# Altium PCB PCB1.PcbDoc
Units mm, origin at the board's own origin, x right, y up, seen from the top; angles counter-clockwise.
Board outline 49.15 x 32.13 mm, 2 copper layers (Top Layer, Bottom Layer), stack 1.571 mm thick; 7 components, 5 nets, 22 pads, 59 vias.
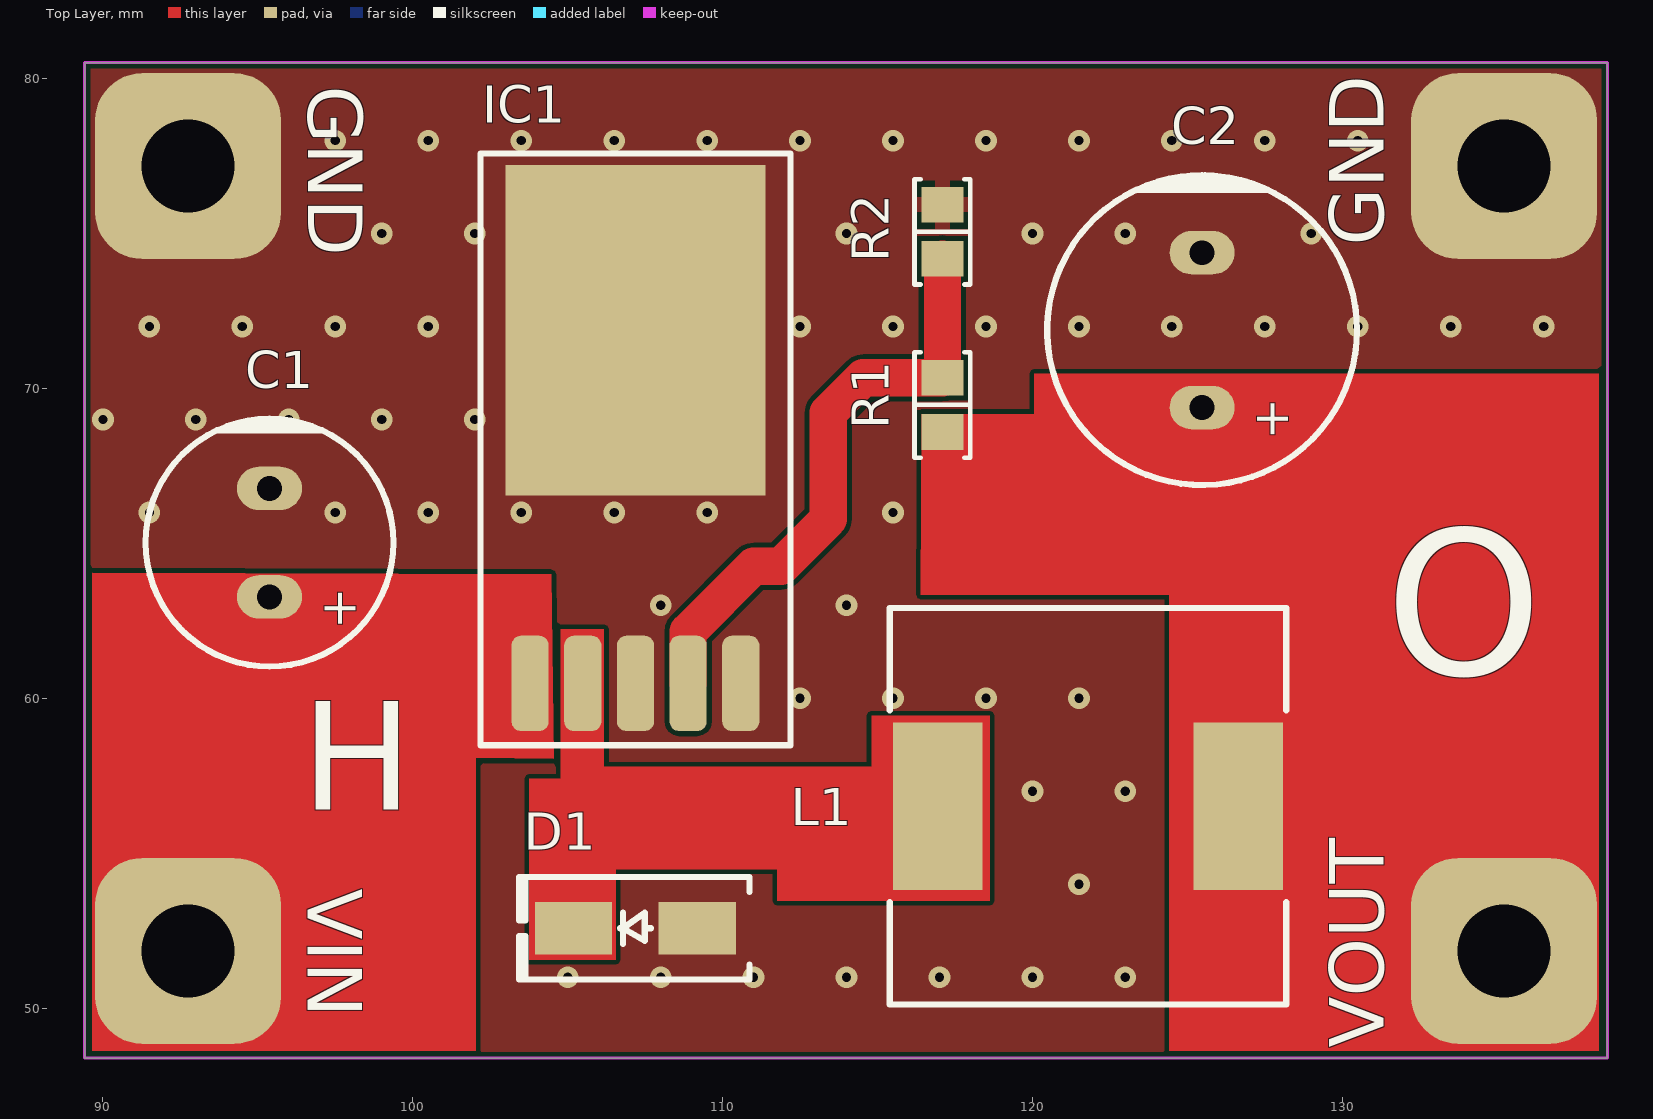
[diagram p0: Top Layer view]
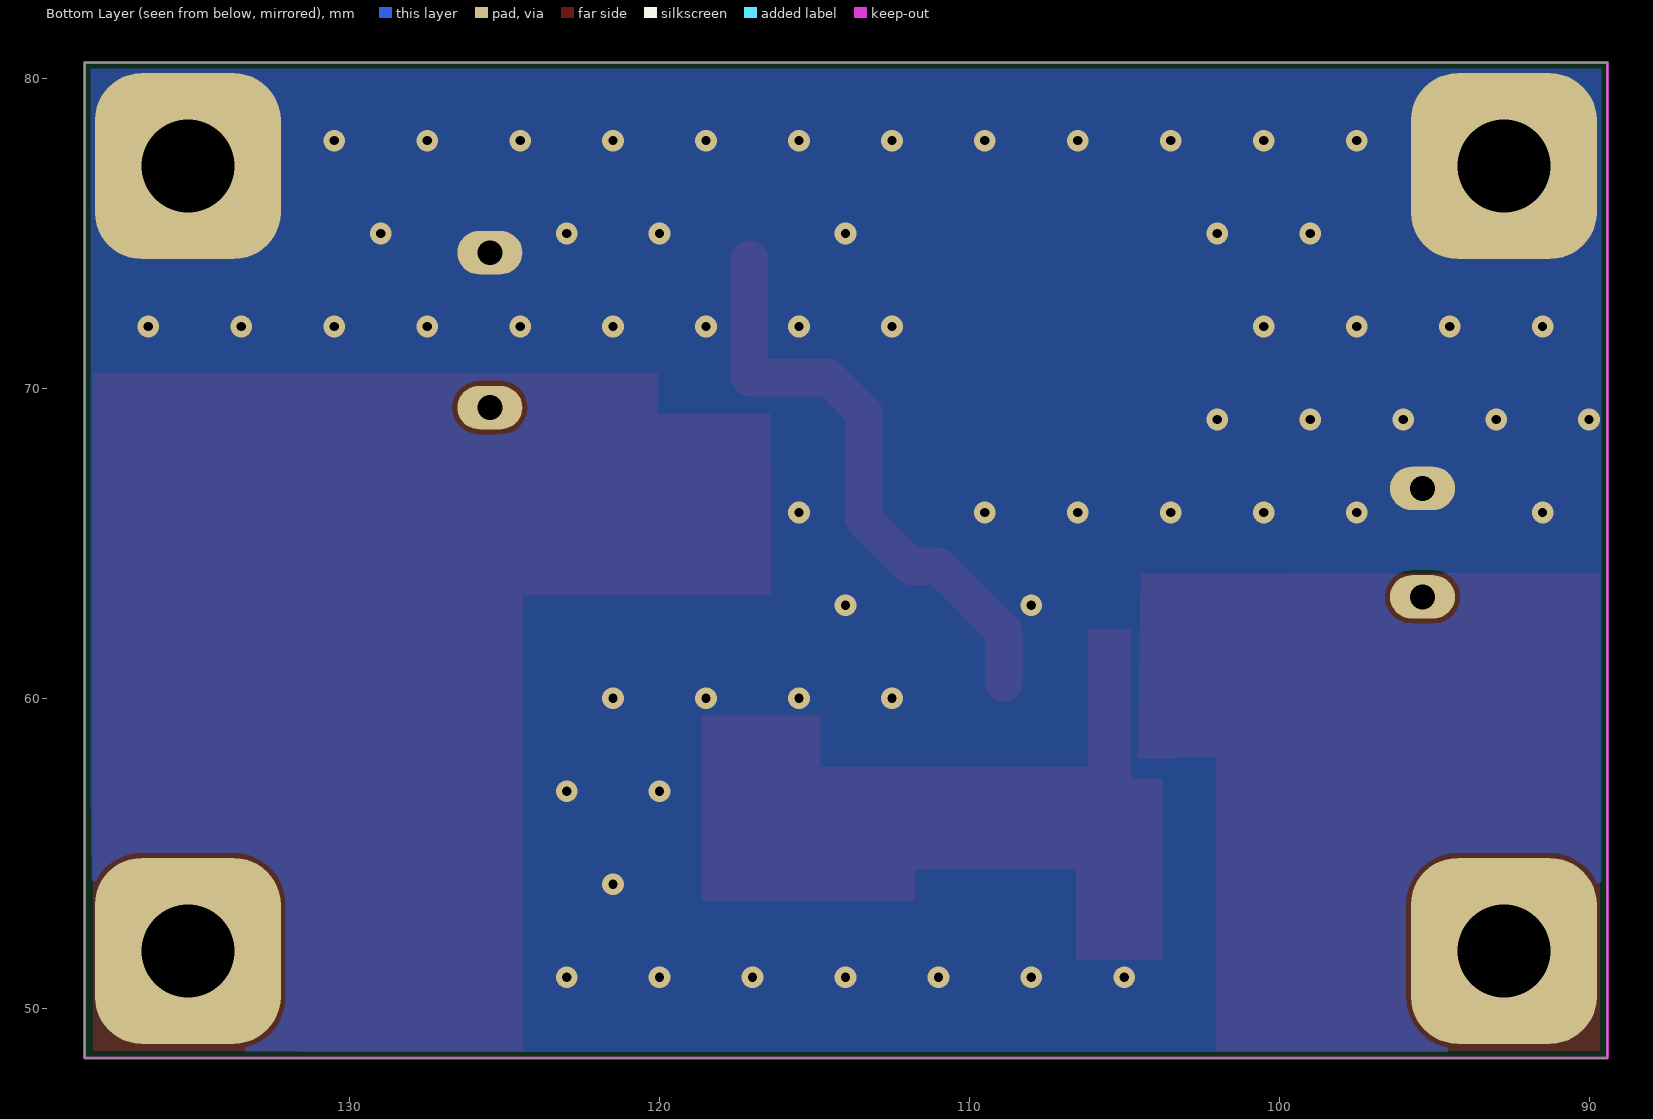
[diagram p1: Bottom Layer view, seen from below]
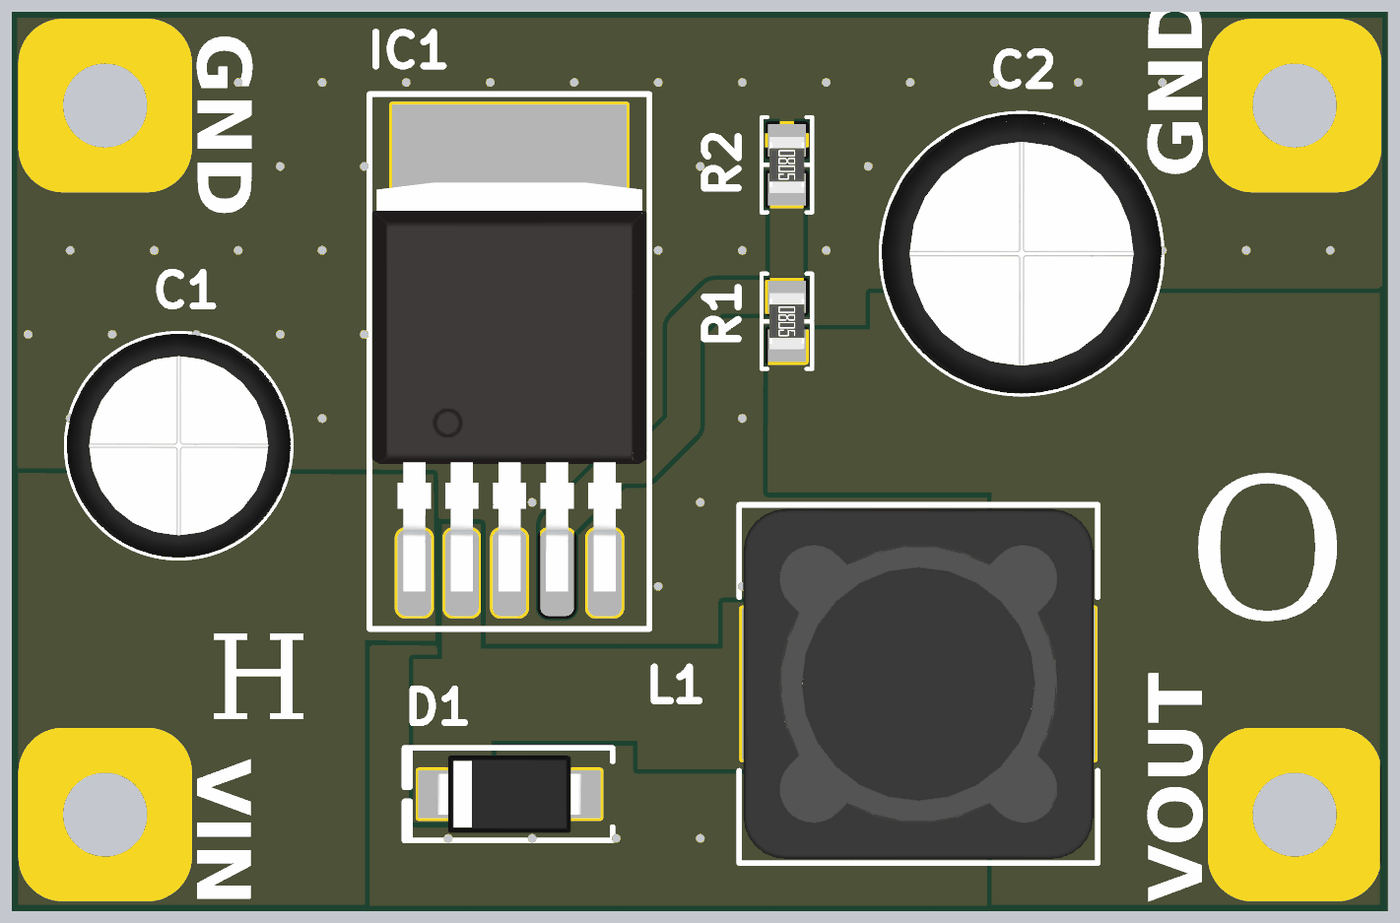
[diagram p2: 3D render of the assembled board from above, using the file's embedded part models]

## Layer stack, top to bottom
Top Solder: solder mask 0.0102, Solder Resist, Dk 3.5
Top Layer: signal copper 0.0356
Dielectric 1: dielectric 1.5, FR-4, Dk 4.8
Bottom Layer: signal copper 0.0356
Bottom Solder: solder mask 0.0102, Solder Resist, Dk 3.5

## Board outline
89.408,48.387 138.557,48.387 138.557,80.518 89.408,80.518

## Design rules (kind name [scope] priority, off if disabled: settings)
Clearance [All] p1: gap=0.152 ignorepadtopadclearanceinfootprint=FALSE
HoleSize [All] p1: absolutevalues=TRUE maxlimit=5 minlimit=0.025 maxpercent=80.000 minpercent=20.000
PolygonConnect [All] p1: thpad.connectstyle=Direct thpad.reliefconductorwidth=0.254 thpad.reliefentries=4 thpad.polygonreliefangle="90 Angle" thpad.airgapwidth=0.254 smdpad.connectstyle=Relief smdpad.reliefconductorwidth=0.5 smdpad.reliefentries=4 smdpad.polygonreliefangle="90 Angle" smdpad.airgapwidth=0.2 via.connectstyle=Direct via.reliefconductorwidth=0.254 via.reliefentries=4 via.polygonreliefangle="90 Angle" via.airgapwidth=0.254
RoutingVias [All] p1: holewidth=0.711 width=1.27 viastyle="Through Hole" minholewidth=0.711 minwidth=1.27 maxholewidth=0.711 maxwidth=1.27
SolderMaskExpansion [All] p1: expansion=0.102 istentingtop=FALSE
Width [All] p1: maxlimit=2 minlimit=0.152 preferedwidth=0.5
29 further rules are at their usual default settings.

## Components (designator, comment, footprint, x,y, rotation, side; value= is the part's Value field where it differs from the comment)
C1 "100µF" "CAP TH ALUM ELEC D8.00mm S3.50mm H12.50mm" 95.377,65.024 r270 top
C2 "220µF" "CAP TH ALUM ELEC D10.00mm S5.00mm H13.50mm" 125.476,71.882 r270 top
D1 "ACDBA560-HF" "DO214AC SMA" 107.188,52.578 r180 top
IC1 "LM2596" D2PAC 107.188,69.382 r0 top
L1 "33µH" "BOURNS SRR1280" 121.793,56.515 r0 top
R1 "10 kOhms" "RES 0805_2012" 117.094,69.469 r270 top
R2 "4.7 kOhms" "RES 0805_2012" 117.094,75.057 r270 top

## Footprints (in the part's own frame and the unit in brackets; to place one, negate y for a bottom-side part, rotate by r counter-clockwise, add the part's x,y. Pads: shape width x height; smd on the part's side, far side on the other; paste and mask are expansions set on the pad)
"BOURNS SRR1280" [mm] "Precision Wire Wound Inductor, 2-Leads, Body 12.50x12.50mm, IPC Medium Density"
  rect 2.9x5.4 smd: 1(-4.85,0) 2(4.85,0)
  silkscreen extent -6.4,-6.4 6.4,6.4, body extent -6.25,-6.25 6.25,6.25, height 7.9
"CAP TH ALUM ELEC D8.00mm S3.50mm H12.50mm" [mm] "8mm Diameter 3.5mm Lead Spacing Aluminum Electrolytic Capacitors Radial, Can"
  oval 1.4x2.1 hole 0.8: 1(1.75,0) 2(-1.75,0)
  silkscreen extent -4,-4 4,4, body extent -4.01,-4 4,4, height 12.5
"CAP TH ALUM ELEC D10.00mm S5.00mm H13.50mm" [mm] "10mm Diameter 5mm Lead Spacing Aluminum Electrolytic Capacitors Radial, Can"
  oval 1.4x2.1 hole 0.8: 1(2.5,0) 2(-2.5,0)
  silkscreen extent -5,-5 5,5, body extent -5.01,-5 5,5, height 13.5
D2PAC [mm]
  rrect50% 1.2x3.075 smd: 1(-3.4,-8.9) 2(-1.7,-8.9) 3(0,-8.9) 4(1.7,-8.9) 5(3.4,-8.9)
  rect 8.38x10.66 smd: 3(0,2.5)
  silkscreen extent -5,-10.9 5,8.2, body extent -4.91,-9.56 4.91,5.04, height 4.22
"DO214AC SMA" [mm] "Molded Diode, 2-Leads, Body 4.30x2.60mm, IPC Medium Density"
  rect 2.5x1.7 smd: 1(-2,0) 2(2,0)
  silkscreen extent -3.68,-1.65 3.75,1.65, body extent -2.6,-1.37 2.6,1.37, height 2.4
"RES 0805_2012" [mm] "Chip Resistor, 2-Leads, Body 2.00x1.25mm, IPC Medium Density"
  rect 1.15x1.35 smd: 1(-0.875,0) 2(0.875,0)
  silkscreen extent -1.7,-0.9 1.7,0.9, body extent -1,-0.62 1,0.63, height 0.6

## Part data
C1: library part ECA-1JM101, "CAP ALUM 100UF 20% 63V RADIAL", Device Package="Radial, Can", Lifetime @ Temp.="2000 Hrs @ 85°C", Manufacturer="Panasonic Electronic Components", Operating Temperature="-40°C ~ 85°C", Ripple Current @ High Frequency="459mA @ 10kHz", Ripple Current @ Low Frequency="270mA @ 120Hz", Supplier Part Number 1=P5193-ND, Tolerance=±20%, Voltage - Rated=63V, Applications="General Purpose", Capacitance=100µF, ComponentLink1Description=Datasheet, ComponentLink1URL=//media.digikey.com/pdf/Data%20Sheets/Panasonic%20Electronic%20Components/ECA-xxM%20Series,TypeA.pdf, ComponentLink2Description="DigiKey Link", ComponentLink2URL=http://digikey.com/product-detail/en/panasonic-electronic-components/ECA-1JM101/P5193-ND/245052, Height - Seated (Max)="0.492\" (12.50mm)", LastUpdated="7.09.2020 05:24:51", Lead Spacing="0.138\" (3.50mm)", Lifecycle Status=Active, Minimum Order=1, Mounting Type="Through Hole", Package / Case="Radial, Can", Packaging=Bulk, Part Number=ECA-1JM101, Part Status=Active, PartId=7225, Polarization=Polar, Price=0.37, Series=M, Size / Dimension="0.315\" Dia (8.00mm)", Supplier 1=DigiKey
C2: library part ECA-1HM221, "CAP ALUM 220UF 20% 50V RADIAL", Device Package="Radial, Can", Lifetime @ Temp.="2000 Hrs @ 85°C", Manufacturer="Panasonic Electronic Components", Operating Temperature="-40°C ~ 85°C", Ripple Current @ High Frequency="680mA @ 10kHz", Ripple Current @ Low Frequency="400mA @ 120Hz", Supplier Part Number 1=P5183-ND, Tolerance=±20%, Voltage - Rated=50V, Applications="General Purpose", Capacitance=220µF, ComponentLink1Description=Datasheet, ComponentLink1URL=//media.digikey.com/pdf/Data%20Sheets/Panasonic%20Electronic%20Components/ECA-xxM%20Series,TypeA.pdf, ComponentLink2Description="DigiKey Link", ComponentLink2URL=http://digikey.com/product-detail/en/panasonic-electronic-components/ECA-1HM221/P5183-ND/245042, Height - Seated (Max)="0.532\" (13.50mm)", LastUpdated="2.09.2020 01:31:06", Lead Spacing="0.197\" (5.00mm)", Lifecycle Status=Active, Minimum Order=1, Mounting Type="Through Hole", Package / Case="Radial, Can", Packaging=Bulk, Part Number=ECA-1HM221, Part Status=Active, PartId=10825, Polarization=Polar, Price=0.41, Series=M, Size / Dimension="0.394\" Dia (10.00mm)", Supplier 1=DigiKey
D1: "DIODE SCHOTTKY 60V 5A DO214AC", Capacitance @ Vr, F="250pF @ 4V, 1MHz", Current - Average Rectified (Io)="5A (DC)", Current - Reverse Leakage @ Vr="500µA @ 60V", Manufacturer="Comchip Technology", Operating Temperature - Junction="-55°C ~ 125°C", Package / Case="DO-214AC, SMA", Supplier Device Package="DO-214AC (SMA)", Supplier Part Number 1=641-2078-1-ND, Voltage - DC Reverse (Vr) (Max)=60V, Voltage - Forward (Vf) (Max) @ If="700mV @ 5A", ComponentLink1Description=Datasheet, ComponentLink1URL=http://www.comchiptech.com/admin/files/product/ACDBA560-HF%20RevA201382.pdf, ComponentLink2Description="DigiKey Link", ComponentLink2URL=http://digikey.com/product-detail/en/comchip-technology/ACDBA560-HF/641-2078-1-ND/10131664, Diode Type=Schottky, LastUpdated="2.09.2020 01:19:04", Lifecycle Status=Active, Minimum Order=1, Mounting Type="Surface Mount", Packaging=TapeAndReel, Part Number=ACDBA560-HF, Part Status=Active, PartId=1832, Price=0.13, Series="Automotive, AEC-Q101", Speed="Fast Recovery =< 500ns, > 200mA (Io)", Supplier 1=DigiKey
L1: library part SRR1280-330M, "FIXED IND 33UH 3.5A 57 MOHM SMD", Current - Saturation=3.3A, Current Rating (Amps)=3.5A, DC Resistance (DCR)="57mOhm Max", Device Package=Nonstandard, Frequency - Self Resonant=9.5MHz, Manufacturer="Bourns Inc.", Operating Temperature="-40°C ~ 125°C", Q @ Freq="28 @ 2.52MHz", Supplier Part Number 1=SRR1280-330MCT-ND, Tolerance=±20%, Inductance Frequency - Test=100kHz, ComponentLink1Description=Datasheet, ComponentLink1URL=https://www.bourns.com/docs/Product-Datasheets/SRR1280.pdf, ComponentLink2Description="DigiKey Link", ComponentLink2URL=http://digikey.com/product-detail/en/bourns-inc/SRR1280-330M/SRR1280-330MCT-ND/2127440, Height - Seated (Max)="0.315\" (8.00mm)", LastUpdated="2.09.2020 01:22:09", Lifecycle Status=Active, Material - Core=Ferrite, Minimum Order=1, Mounting Type="Surface Mount", Package / Case=Nonstandard, Packaging=TapeAndReel, Part Number=SRR1280-330M, Part Status=Active, PartId=25, Price=0.65, Series=SRR1280, Shielding=Shielded, Size / Dimension="0.492\" L x 0.492\" W (12.50mm x 12.50mm)", Supplier 1=DigiKey, Type=Wirewound, Inductance=33µH
R1: library part RNCP0805FTD10K0, "RES 10K OHM 1% 1/4W 0805", Device Package="0805 (2012 Metric)", Manufacturer="Stackpole Electronics Inc", Operating Temperature="-55°C ~ 155°C", Power (Watts)="0.25W, 1/4W", Supplier Device Package=0805, Supplier Part Number 1=RNCP0805FTD10K0CT-ND, Temperature Coefficient=±100ppm/°C, Tolerance=±1%, ComponentLink1Description=Datasheet, ComponentLink1URL=https://www.seielect.com/catalog/sei-rncp.pdf, ComponentLink2Description="DigiKey Link", ComponentLink2URL=http://digikey.com/product-detail/en/stackpole-electronics-inc/RNCP0805FTD10K0/RNCP0805FTD10K0CT-ND/2240601, Composition="Thin Film", Features="Anti-Sulfur, Moisture Resistant", Height - Seated (Max)="0.024\" (0.60mm)", LastUpdated="2.09.2020 01:15:23", Lifecycle Status=Active, Minimum Order=1, Number of Terminations=2, Package / Case="0805 (2012 Metric)", Packaging=TapeAndReel, Part Number=RNCP0805FTD10K0, Part Status=Active, PartId=28021, Price=0.01, Resistance="10 kOhms", Series=RNCP, Size / Dimension="0.079\" L x 0.049\" W (2.00mm x 1.25mm)", Supplier 1=DigiKey
R2: library part CRGP0805F4K7, "CRGP 0805 4K7 1%", Device Package="0805 (2012 Metric)", Manufacturer="TE Connectivity Passive Product", Operating Temperature="-55°C ~ 155°C", Power (Watts)="0.333W, 1/3W", Supplier Device Package=0805, Supplier Part Number 1=A130485CT-ND, Temperature Coefficient=±100ppm/°C, Tolerance=±1%, ComponentLink1Description=Datasheet, ComponentLink1URL=https://www.te.com/commerce/DocumentDelivery/DDEController?Action=srchrtrv&DocNm=9-1773463-9&DocType=DS&DocLang=English, ComponentLink2Description="DigiKey Link", ComponentLink2URL=http://digikey.com/product-detail/en/te-connectivity-passive-product/CRGP0805F4K7/A130485CT-ND/8578317, Composition="Thick Film", Features="Pulse Withstanding", Height - Seated (Max)="0.026\" (0.65mm)", LastUpdated="2.09.2020 01:15:22", Lifecycle Status=Active, Minimum Order=1, Number of Terminations=2, Package / Case="0805 (2012 Metric)", Packaging=TapeAndReel, Part Number=CRGP0805F4K7, Part Status=Active, PartId=28726, Price=0.02, Resistance="4.7 kOhms", Series=CRGP, Size / Dimension="0.079\" L x 0.049\" W (2.00mm x 1.25mm)", Supplier 1=DigiKey

## Free pads (board coordinates)
  rrect50% 6x6 hole 3: GND(92.75,77.175) GND(135.225,77.175) VIN(92.75,51.85) VOUT(135.225,51.85)

## Via types
v1: diameter 0.7, hole 0.3, Top Layer to Bottom Layer, tented both sides, 59 vias

## Nets (pads, with @x,y where several pads share a name; then routed paths per layer and width w, separated by ;. In a path a pad name is that pad's centre, name@x,y a point inside that pad or via, vN(x,y) a via of type N, cw(c..) or ccw(c..) an arc to the next point about the centre after c; other vN are vias at no path point)
FeedBack: IC1.4 R1.1 R2.2 | length 19.1
  Top Layer w1.2: IC1.4 108.888,62.152 110.998,64.262 111.887,64.262 113.411,65.786 113.411,69.215 114.54,70.344 R1.1 R2.2
GND: C1.2 C2.2 D1.1 IC1.3 IC1.5 pad.GND R2.1
  other v1: 105,51 108,51 111,51 114,51 117,51 120,51 123,51 121.5,54 120,57 123,57 112.5,60 115.5,60 118.5,60 121.5,60 108,63 114,63 91.5,66 97.5,66 100.5,66 103.5,66 106.5,66 109.5,66 115.5,66 90,69 93,69 96,69 99,69 102,69 91.5,72 94.5,72 97.5,72 100.5,72 112.5,72 115.5,72 118.5,72 121.5,72 124.5,72 127.5,72 130.5,72 133.5,72 136.5,72 99,75 102,75 114,75 120,75 123,75 129,75 97.5,78 100.5,78 103.5,78 106.5,78 109.5,78 112.5,78 115.5,78 118.5,78 121.5,78 124.5,78 127.5,78 130.5,78
NetD1_2: D1.2 IC1.2 L1.1
VCC: C1.1 IC1.1 pad.VIN
Vout: C2.1 L1.2 pad.VOUT R1.2

## Polygon pours and split planes (outlines as drawn)
GND on Bottom Layer "GND_L02_P000" (solid, pour order 0): 138.557,80.518 138.275,48.625 89.408,48.387 89.408,80.518
GND on Top Layer "GND_L01_P002" (solid, pour order 2): 138.557,80.518 138.275,48.625 89.408,48.387 89.408,80.518

## Keep-outs
Keep-Out Layer:
  the board outline again, w0.1

## Other copper
Top Layer:
  region net VCC: 89.65,64.051 104.475,64 104.55,58.05 102.025,58.075 102.025,48.629 89.65,48.629
  region net Vout: 116.425,69.175 116.4,63.35 124.411,63.35 124.411,48.625 138.275,48.625 138.275,70.475 132.625,70.475 120.062,70.475 120.062,69.175
  region: 116.425,69.175
  region net NetD1_2: 106.172,62.23 106.172,57.785 114.808,57.785 114.808,59.436 118.618,59.436 118.618,53.467 111.76,53.467 111.76,54.483 106.553,54.483 106.553,51.562 103.759,51.562 103.759,57.404 104.775,57.404 104.775,62.23

## Silkscreen, mask and mechanical layers (free items; w line width, h text height)
Top Overlay:
  text "GND" at 96.051,79.775 h3 r270
  text "GND" at 131.924,74.6 h3 r90
  text "O" at 131.39,58.855 h10
  text "H" at 96.402,55.255 h6
  text "VIN" at 96.025,53.85 h3 r270
  text "VOUT" at 131.924,48.725 h3 r90

## Text inside footprints (layer, text, board x,y; h text height)
C1: Top Overlay "+" at 96.777,63.574 h2 r270
C2: Top Overlay "+" at 126.876,69.682 h2 r270